# Altium PCB 信号采集板.PcbDoc (part 4 of 4)
Units mil, origin at the board's own origin, x right, y up, seen from the top; angles counter-clockwise.
Board outline 5905.51 x 1775.59 mil, 2 copper layers (Top Layer, Bottom Layer); 203 components, 126 nets, 643 pads, 227 vias.
Unrouted connection lines stored in the file: 2.
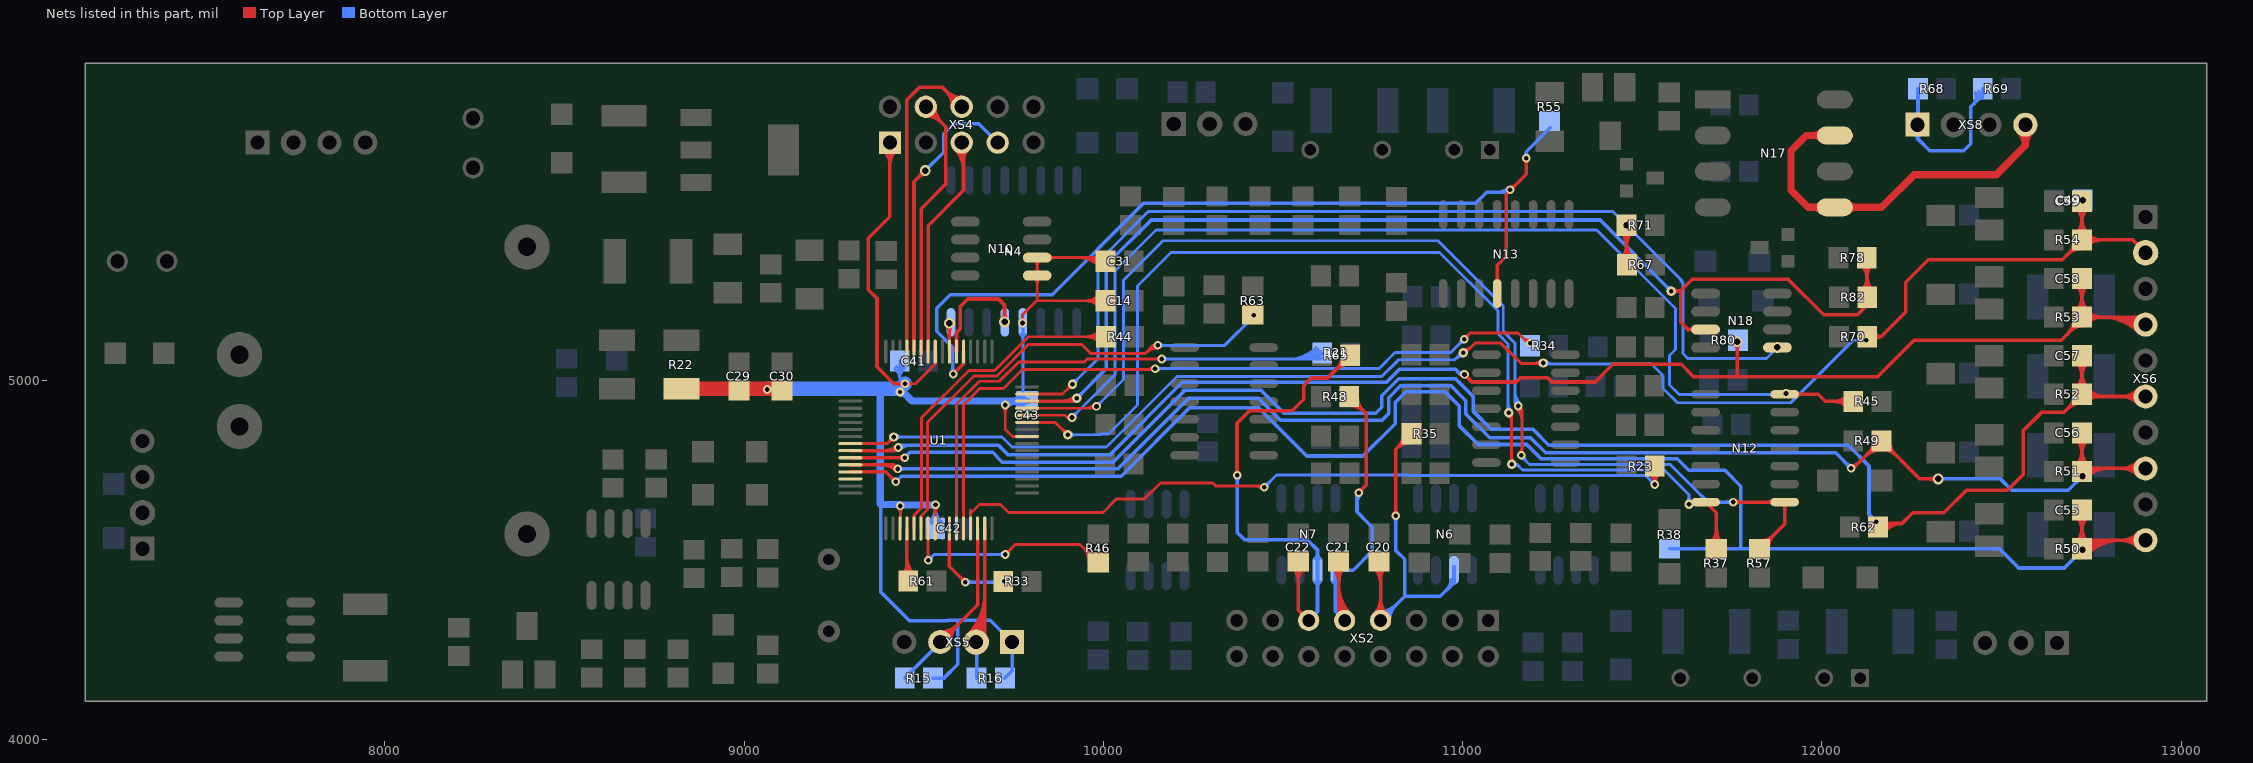
[diagram p4: the nets of this part, all layers, seen from the top]

## Via types
v1: diameter 24, hole 13, Top Layer to Bottom Layer, 112 vias
v2: diameter 30, hole 18, Top Layer to Bottom Layer, 58 vias
v3: diameter 25, hole 12, Top Layer to Bottom Layer, 22 vias
v4: diameter 26, hole 13, Top Layer to Bottom Layer, 17 vias
v5: diameter 35, hole 20, Top Layer to Bottom Layer, 12 vias
v6: diameter 40, hole 25, Top Layer to Bottom Layer, 2 vias
v7: diameter 30, hole 20, Top Layer to Bottom Layer, 2 vias
v8: diameter 25, hole 15, Top Layer to Bottom Layer, 2 vias

## Nets (pads, with @x,y where several pads share a name; then routed paths per layer and width w, separated by ;. In a path a pad name is that pad's centre, name@x,y a point inside that pad or via, vN(x,y) a via of type N, cw(c..) or ccw(c..) an arc to the next point about the centre after c; other vN are vias at no path point) (continued)
NTC4: C20.2 N6.2 R35.2 XS2.7 | length 1549.8
  Top Layer w10: C20.2@10753.05,4480.3 cw(c10708.49,4435.73) 10771.51,4435.73 ; XS2.7@10754.17,4349.82 ccw(c10712.3,4391.69) 10771.51,4391.69 ccw(c10830.73,4391.69) XS2.7@10788.86,4349.82 ; C20.2@10760.12,4487.37 cw(c10732.63,4459.88) 10771.51,4459.88 ; XS2.7@10761.24,4342.74 ccw(c10736.44,4367.54) 10771.51,4367.54 ccw(c10806.58,4367.54) XS2.7@10781.78,4342.74 ; C20.2@10767.04,4496.25 10771.51,4491.78 XS2.7@10771.51,4332.47 ; 10771.51,4447.85 cw(c10817.41,4447.85) C20.2@10784.96,4480.3 ; v1@10809.05,4628.95 ccw(c10797.1,4640.9) 10814,4640.9 ccw(c10830.9,4640.9) v1@10818.95,4628.95 ; v1(10814,4624) 10814,4667 10814,4678 10814,4685 10814,4808.74 R35.2@10857.26,4852 ; 10815.39,4810.13 cw(c10857.26,4768.26) R35.2@10857.26,4827.47 ; 10820.14,4814.88 ccw(c10784.99,4850.03) R35.2@10834.7,4850.03 ; R35.2@10832.46,4827.2 cw(c10857.26,4802.4) R35.2@10857.26,4837.47
  Bottom Layer w10: XS2.7@10771.51,4332.47 10838.44,4399.4 ; XS2.7@10771.51,4347 ccw(c10771.51,4382.07) 10796.31,4357.27 ccw(c10821.11,4332.47) XS2.7@10786.04,4332.47 ; XS2.7@10771.51,4357 ccw(c10771.51,4416.21) 10813.38,4374.34 ccw(c10855.25,4332.47) XS2.7@10796.04,4332.47 ; v1@10809.05,4619.05 cw(c10797.1,4607.1) 10814,4607.1 cw(c10830.9,4607.1) v1@10818.95,4619.05 ; v1(10814,4624) 10814,4592 10814,4526.99 10815.19,4525.8 10838.44,4502.55 10838.44,4399.4 ; 10954.8,4416.55 ccw(c10925.35,4446) N6.2@10967,4446 ; N6.2@10976,4482 10976,4437.75 10937.65,4399.4 10838.44,4399.4
NTC5: C21.2 N7.1 R48.2 XS2.9 | length 1563.7
  Top Layer w10: C21.2@10638.78,4480.3 cw(c10600.27,4441.79) 10654.73,4441.79 cw(c10709.19,4441.79) C21.2@10670.68,4480.3 ; C21.2@10645.85,4487.37 cw(c10624.41,4465.93) 10654.73,4465.93 cw(c10685.05,4465.93) C21.2@10663.61,4487.37 ; 10654.73,4359.78 ccw(c10698.82,4359.78) XS2.9@10667.64,4328.6 ; 10654.73,4383.92 ccw(c10722.96,4383.92) XS2.9@10674.71,4335.67 ; 10654.73,4408.07 ccw(c10747.11,4408.07) XS2.9@10681.78,4342.74 ; 10654.73,4432.21 ccw(c10771.25,4432.21) XS2.9@10688.86,4349.82 ; C21.2@10654.73,4496.25 10654.73,4349.26 XS2.9@10671.51,4332.47 ; R48.2@10684.43,4930.78 cw(c10684.43,4871.56) 10726.3,4913.44 ; R48.2@10684.43,4940.78 cw(c10684.43,4905.71) R48.2@10709.23,4930.51 ; R48.2@10684.43,4955.31 10732,4907.73 10732,4709 v1(10711,4688) ; R48.2@10706.98,4953.34 ccw(c10756.69,4953.34) 10721.54,4918.19 ; v1@10711,4695 ccw(c10711,4711.9) 10722.95,4699.95 ccw(c10734.9,4688) v1@10718,4688
  Bottom Layer w10: N7.1@10639.64,4439.64 cw(c10624.27,4424.27) 10646,4424.27 cw(c10667.73,4424.27) N7.1@10652.36,4439.64 ; N7.1@10646,4492 N7.1@10646,4472 ; N7.1@10652.36,4465.64 cw(c10667.73,4450.27) 10667.73,4472 cw(c10667.73,4493.73) N7.1@10652.36,4478.36 ; XS2.9@10671.51,4332.47 10646,4357.98 N7.1@10646,4472 ; 10706,4659.03 cw(c10739.97,4659.03) v1@10715.95,4683.05 ; v1(10711,4688) 10706,4683 10706,4634.68 10738.94,4601.74 10748.68,4592 10748.68,4525.39 10695.29,4472 N7.1@10646,4472
NTC6: C22.2 N7.2 R65.2 XS2.11 | length 1728.5
  Top Layer w10: v1@10368.05,4740.95 ccw(c10358.51,4750.49) 10372,4750.49 ; v1@10372,4737 10372,4881 10407,4916 ; 10372,4755.31 ccw(c10392.31,4755.31) v1@10377.95,4740.95 ; 10410,4916 10526,4916 10557.82,4947.82 10557.82,4985.82 10579,5007 10623.99,5007 R65.2@10687.18,5070.19 ; C22.2@10526.47,4480.3 cw(c10487.96,4441.79) 10542.42,4441.79 cw(c10596.88,4441.79) C22.2@10558.37,4480.3 ; C22.2@10533.54,4487.37 cw(c10512.1,4465.93) 10542.42,4465.93 cw(c10572.74,4465.93) C22.2@10551.3,4487.37 ; C22.2@10542.42,4496.25 10542.42,4361.56 XS2.11@10571.51,4332.47 ; 10645.31,5028.32 cw(c10687.18,4986.45) R65.2@10687.18,5045.66 ; 10650.06,5033.07 ccw(c10614.91,5068.22) R65.2@10664.62,5068.22 ; R65.2@10662.38,5045.39 cw(c10687.18,5020.59) R65.2@10687.18,5055.66
  Bottom Layer w10: v1@10368.05,4731.05 cw(c10356.1,4719.1) 10373,4719.1 cw(c10389.9,4719.1) v1@10377.95,4731.05 ; v1(10373,4736) 10373,4577 10393.12,4556.88 10567.57,4556.88 10596,4528.46 N7.2@10596,4472 ; XS2.11@10571.51,4332.47 10596,4356.96 N7.2@10596,4472 ; N7.2@10589.64,4439.64 cw(c10574.27,4424.27) 10596,4424.27 cw(c10617.73,4424.27) N7.2@10602.36,4439.64 ; N7.2@10589.64,4504.36 ccw(c10574.27,4519.73) 10596,4519.73 ccw(c10617.73,4519.73) N7.2@10602.36,4504.36 ; N7.2@10596,4492 N7.2@10596,4472
PD1: C49.1 C59.1 R54.2 R70.1 U1.9 XS6.2 | length 5101.4
  Top Layer w8: U1.9@9296,4824.52 9398.52,4824.52 v4(9417,4843) ; v4@9408,4843 cw(c9386.27,4843) 9401.64,4827.64 cw(c9417,4812.27) v4@9417,4834 ; v4(11002,5077) 11007,5077 11034,5104 11106,5104 11163,5047 11222,5047 v4(11224,5049) ; v4@11002,5086 ccw(c11002,5119.8) 11025.9,5095.9 ; v4@11011,5077 cw(c11020.66,5077) 11013.83,5083.83 ; 11197.44,5047 ccw(c11197.44,5075.56) v4@11217.64,5055.36 ; 11207.1,5047 cw(c11207.1,5032.1) v4@11217.64,5042.64 ; v4(12123,5112) R70.1@12127,5108
  Top Layer w10: R70.1@12121.53,5113.36 cw(c12141.31,5095.06) R70.1@12141.31,5122 ; R70.1@12126,5122 12164.19,5122 ; R70.1@12128.87,5106.57 cw(c12164.19,5073.88) 12164.19,5122 ; R70.1@12145.76,5111.11 cw(c12164.19,5100.96) 12164.19,5122 ; R70.1@12145.76,5132.89 ccw(c12164.19,5143.04) 12164.19,5122 ; 12681.85,5349.48 cw(c12723.72,5307.61) R54.2@12723.72,5366.82 ; 12686.6,5354.23 ccw(c12651.45,5389.38) R54.2@12701.16,5389.38 ; R54.2@12698.92,5366.55 cw(c12723.72,5341.75) R54.2@12723.72,5376.82 ; R54.2@12707.76,5409.27 ccw(c12669.25,5447.78) 12723.72,5447.78 ccw(c12778.18,5447.78) R54.2@12739.67,5409.27 ; C59.1@12707.76,5480.85 cw(c12669.25,5442.34) 12723.72,5442.34 cw(c12778.18,5442.34) C59.1@12739.67,5480.85 ; R54.2@12714.84,5402.2 ccw(c12693.4,5423.64) 12723.72,5423.64 ccw(c12754.04,5423.64) R54.2@12732.6,5402.2 ; C59.1@12714.84,5487.92 cw(c12693.4,5466.48) 12723.72,5466.48 cw(c12754.04,5466.48) C59.1@12732.6,5487.92 ; C59.1@12718.93,5494.93 cw(c12707.37,5483.37) C59.1@12723.72,5483.37 ; C59.1@12723.72,5472.35 cw(c12755.66,5472.35) C59.1@12733.07,5494.93 ; C59.1@12723.72,5498.77 R54.2@12723.72,5391.35 ; R54.2@12732.6,5382.47 cw(c12754.04,5361.03) 12754.04,5391.35 cw(c12754.04,5421.67) R54.2@12732.6,5400.23 ; R54.2@12739.67,5375.4 cw(c12778.18,5336.89) 12778.18,5391.35 cw(c12778.18,5445.81) R54.2@12739.67,5407.3 ; XS6.2@12900.65,5355.46 12864.76,5391.35 R54.2@12723.72,5391.35 ; 12164.19,5122 12232.93,5190.74 12232.93,5273.42 12295.92,5336.41 12668.77,5336.41 R54.2@12723.72,5391.35
  Bottom Layer w8: v4(9417,4843) 9718,4843 9746,4815 10009,4815 10205,5011 10775,5011 10822,5058 10977,5058 v4@10996,5077 ; v4@9423.36,4836.64 cw(c9438.73,4821.27) 9438.73,4843 cw(c9438.73,4864.73) v4@9423.36,4849.36 ; 10976.39,5057.39 cw(c11002,5031.79) v4@11002,5068 ; 10990.05,5071.05 cw(c11002,5059.1) v4@11002,5076 ; v4(11224,5049) v4@11231,5049 ; v4@11227.5,5045.5 11228,5046 11526,5046 11558,5014 11558,4978 11598,4938 11836,4938 ; v4@11230.36,5042.64 cw(c11238.49,5034.51) 11238.49,5046 ; v4@11230.36,5055.36 ccw(c11252.97,5077.97) 11252.97,5046 ; 11845,4938 11836,4938 ; v4@12116.64,5105.64 ccw(c12101.27,5090.27) 12101.27,5112 ccw(c12101.27,5133.73) v4@12116.64,5118.36 ; v4(12123,5112) 12087,5112 11913,4938 11836,4938
  other v2: 12726,5502
PD1_FALULT: N18.1 R67.2 R71.1 U1.47 | length 3172.8
  Top Layer w8: U1.47@9788.12,4962.31 9886.39,4962.31 v4(9914.03,4989.95) ; v4@9905.03,4989.95 cw(c9883.3,4989.95) 9898.67,4974.59 cw(c9914.03,4959.22) v4@9914.03,4980.95
  Top Layer w10: R71.1@11440.05,5414.08 cw(c11401.54,5375.57) 11456,5375.57 cw(c11510.46,5375.57) R71.1@11471.95,5414.08 ; R67.2@11441.31,5339.92 ccw(c11405.84,5375.39) 11456,5375.39 ; R71.1@11447.12,5421.15 cw(c11425.68,5399.71) 11456,5399.71 cw(c11486.32,5399.71) R71.1@11464.88,5421.15 ; R71.1@11449.31,5408.49 cw(c11446.48,5399.4) 11456,5399.4 ; 11456,5357.33 ccw(c11490.62,5357.33) R67.2@11466.14,5332.85 ; 11456,5381.47 ccw(c11514.76,5381.47) R67.2@11473.21,5339.92 ; R67.2@11457.26,5322 11456,5323.26 11456,5399.4 ; R71.1@11462.69,5408.49 ccw(c11465.52,5399.4) 11456,5399.4
  Bottom Layer w8: v4(9914.03,4989.95) 9984.9,5060.82 9984.9,5329.95 10125.21,5470.27 11417.73,5470.27 v2(11456,5432) 11610.54,5277.46 ; v4@9914.03,4998.95 ccw(c9914.03,5020.68) 9929.4,5005.32 ccw(c9944.76,4989.95) v4@9923.03,4989.95 ; 11606.94,5277.46 11612.88,5271.53 11612.88,5075.12 11626.5,5061.5 11845.5,5061.5 v2(11876,5092)
PD2: C58.1 R53.2 R80.1 U1.10 XS6.4 | length 5083.6
  Top Layer w10: U1.10@9296,4804.83 9420.83,4804.83 v1(9429.57,4813.57) ; 9391.57,4804.83 ccw(c9391.57,4851.57) v1@9424.62,4818.52 ; 9415.72,4804.83 ccw(c9415.72,4827.43) v1@9431.7,4811.45 ; v1@11005,5010 cw(c11005,4993.1) 11016.95,5005.05 cw(c11028.9,5017) v1@11012,5017 ; v1(11005,5017) 11026,4996 11149,4996 11161,5008 11236,5008 11248,4996 11369,4996 11418,5045 11608,5045 11643,5010 12154,5010 12256,5112 12666,5112 12723.72,5169.72 R53.2@12723.72,5176.51 ; v2@11757.35,5100.99 cw(c11740.28,5083.92) 11764.43,5083.92 cw(c11788.57,5083.92) v2@11771.5,5100.99 ; 11764.43,5010.57 v2(11764.43,5108.06) ; 12681.79,5127.79 ccw(c12635.04,5174.55) R53.2@12701.16,5174.55 ; 12693.45,5139.45 cw(c12723.72,5109.18) R53.2@12723.72,5151.99 ; 12698.86,5144.86 ccw(c12669.18,5174.55) R53.2@12711.16,5174.55 ; R53.2@12707.76,5194.43 ccw(c12669.25,5232.94) 12723.72,5232.94 ccw(c12778.18,5232.94) R53.2@12739.67,5194.43 ; C58.1@12707.76,5266.01 cw(c12669.25,5227.5) 12723.72,5227.5 cw(c12778.18,5227.5) C58.1@12739.67,5266.01 ; R53.2@12714.84,5187.36 ccw(c12693.4,5208.8) 12723.72,5208.8 ccw(c12754.04,5208.8) R53.2@12732.6,5187.36 ; C58.1@12714.84,5273.08 cw(c12693.4,5251.64) 12723.72,5251.64 cw(c12754.04,5251.64) C58.1@12732.6,5273.08 ; C58.1@12723.72,5283.93 R53.2@12723.72,5176.51 ; R53.2@12732.6,5167.63 cw(c12754.04,5146.19) 12754.04,5176.51 cw(c12754.04,5206.83) R53.2@12732.6,5185.39 ; R53.2@12739.67,5160.56 cw(c12778.18,5122.05) 12778.18,5176.51 cw(c12778.18,5230.98) R53.2@12739.67,5192.47 ; 12781.11,5176.51 cw(c12781.11,5035.93) XS6.4@12880.52,5135.34 ; 12805.25,5176.51 cw(c12805.25,5060.07) XS6.4@12887.59,5142.41 ; 12829.39,5176.51 cw(c12829.39,5084.21) XS6.4@12894.66,5149.48 ; 12853.53,5176.51 cw(c12853.53,5108.35) XS6.4@12901.73,5156.55 ; XS6.4@12900.65,5155.46 12879.6,5176.51 R53.2@12723.72,5176.51
  Bottom Layer w10: v1(9429.57,4813.57) 9436,4820 9708,4820 9734,4794 9841,4794 ; v1@9434.52,4808.62 cw(c9461.99,4781.16) 9461.99,4820 ; 9846,4794 9841,4794 ; 10985.5,5025.5 ccw(c10995.15,5035.15) v1@11001.66,5023.15 ; v1(11005,5017) 10994,5017 10980,5031 10824,5031 10788,4995 10220,4995 10019,4794 9841,4794
PD2_FALULT: N18.7 R78.2 R82.1 U1.46 | length 3627.7
  Top Layer w10: U1.46@9788.12,4942.63 v4@9917.89,4942.63 ; 9887.33,4942.63 ccw(c9887.33,4989.1) v4@9920.19,4956.24 ; 9911.47,4942.63 ccw(c9911.47,4964.96) v4@9927.26,4949.17 ; v4(11580.59,5248.59) 11581.8,5249.8 11606.94,5249.8 ; v4@11586.25,5242.93 cw(c11602.81,5226.37) 11602.81,5249.8 ; v4@11586.25,5254.25 ccw(c11597,5265) 11597,5249.8 ; N18.7@11643.64,5135.64 ccw(c11628.27,5120.27) 11628.27,5142 ccw(c11628.27,5163.73) N18.7@11643.64,5148.36 ; N18.7@11676,5142 11627,5142 11606.94,5162.06 11606.94,5249.8 ; R78.2@12108.79,5324.08 cw(c12070.28,5285.57) 12124.74,5285.57 cw(c12179.2,5285.57) R78.2@12140.69,5324.08 ; 12109.23,5192.95 ccw(c12098.24,5203.94) R82.1@12109.56,5214.58 ; R82.1@12110.05,5249.92 ccw(c12074.58,5285.39) 12124.74,5285.39 ; R78.2@12115.86,5331.15 cw(c12094.42,5309.71) 12124.74,5309.71 cw(c12155.06,5309.71) R78.2@12133.62,5331.15 ; 12116.52,5200.24 ccw(c12105.76,5211) R82.1@12116.85,5221.43 ; 12124.74,5267.33 ccw(c12159.36,5267.33) R82.1@12134.88,5242.85 ; 12124.74,5291.47 ccw(c12183.5,5291.47) R82.1@12141.95,5249.92 ; R78.2@12124.74,5342 12124.74,5233.26 R82.1@12126,5232 12126,5209.72 12099.07,5182.79 12004.66,5182.79 11905.45,5282 11639.15,5282 11606.94,5249.8
  Bottom Layer w10: v4(9925.84,4950.58) 10008.52,5033.26 10008.52,5322.08 10133.09,5446.65 11382.54,5446.65 v4(11580.59,5248.59) v4@11583.87,5245.31 ; v4@9925.84,4958.58 ccw(c9925.84,4977.9) 9939.5,4964.24 ccw(c9953.16,4950.58) v4@9933.84,4950.58 ; v4@11572.59,5248.59 ccw(c11553.28,5248.59) 11566.93,5262.25 ccw(c11580.59,5275.9) v4@11580.59,5256.59
PD3: C57.1 R52.2 R62.1 U1.11 XS6.6 | length 5260.7
  Top Layer w10: U1.11@9296,4785.15 v1(9447.15,4785.15) ; v1@9442.2,4780.2 ccw(c9430.25,4768.25) 9430.25,4785.15 ccw(c9430.25,4802.05) v1@9442.2,4790.1 ; v1(12151,4607) R62.1@12155,4607 ; R62.1@12155.95,4611.95 ccw(c12179.97,4635.97) R62.1@12179.97,4602 ; R62.1@12156,4602 12222.93,4602 ; R62.1@12165.5,4585.75 cw(c12201.05,4554.98) 12201.05,4602 ; R62.1@12171.95,4609.92 ccw(c12191.07,4629.04) 12191.07,4602 ; R62.1@12173.06,4579.21 cw(c12222.93,4536.05) 12222.93,4602 ; 12681.85,4919.8 cw(c12723.72,4877.93) R52.2@12723.72,4937.15 ; 12686.6,4924.56 ccw(c12651.45,4959.71) R52.2@12701.16,4959.71 ; R52.2@12698.92,4936.88 cw(c12723.72,4912.08) R52.2@12723.72,4947.15 ; R52.2@12707.76,4979.6 ccw(c12669.25,5018.11) 12723.72,5018.11 ccw(c12778.18,5018.11) R52.2@12739.67,4979.6 ; C57.1@12707.76,5051.17 cw(c12669.25,5012.66) 12723.72,5012.66 cw(c12778.18,5012.66) C57.1@12739.67,5051.17 ; R52.2@12714.84,4972.53 ccw(c12693.4,4993.96) 12723.72,4993.96 ccw(c12754.04,4993.96) R52.2@12732.6,4972.53 ; C57.1@12714.84,5058.25 cw(c12693.4,5036.81) 12723.72,5036.81 cw(c12754.04,5036.81) C57.1@12732.6,5058.25 ; C57.1@12723.72,5069.1 R52.2@12723.72,4961.68 ; R52.2@12732.6,4968.59 ccw(c12764.28,5000.27) 12764.28,4955.46 ; R52.2@12739.67,4943.76 cw(c12767.94,4915.49) 12767.94,4955.46 ; R52.2@12739.67,4975.66 ccw(c12788.42,5024.41) 12788.42,4955.46 ; XS6.6@12880.52,4935.34 ccw(c12831.93,4886.75) 12831.93,4955.46 ccw(c12831.93,5024.18) XS6.6@12880.52,4975.59 ; XS6.6@12887.59,4942.41 ccw(c12856.07,4910.89) 12856.07,4955.46 ccw(c12856.07,5000.04) XS6.6@12887.59,4968.52 ; XS6.6@12900.65,4955.46 12729.93,4955.46 R52.2@12723.72,4961.68 ; 12222.93,4602 12252.61,4631.69 12339.23,4631.69 12402.22,4694.68 12516.39,4694.68 12559.7,4737.98 12559.7,4860.03 12610.88,4911.21 12673.25,4911.21 R52.2@12723.72,4961.68
  Bottom Layer w10: v1(9447.15,4785.15) 9462,4800 9692,4800 9719,4773 10027,4773 10224.52,4970.52 ; 10222.04,4973 10439,4973 10503,4909 10758,4909 10775,4926 10775,4957.5 ; 10777.5,4960 10822.25,5004.75 10980.25,5004.75 11030,4955 11030,4914 11080,4864 11196,4864 11240,4820 12073,4820 12131,4762 12131,4627 v1(12151,4607) ; v1@12144,4607 ccw(c12127.1,4607) 12139.05,4618.95 ccw(c12151,4630.9) v1@12151,4614
PD3_FALULT: N12.1 R57.2 U1.45 | length 3607.3
  Top Layer w8: U1.45@9788.12,4922.94 9976,4922.94 v1(9981,4927.94) cw(c9968.93,4940.02) 9968.93,4922.94 ; 9949.62,4922.95 ccw(c9949.62,4959.33) v1@9975.34,4933.6 ; v1@11149.34,4923.34 cw(c11111.54,4885.54) 11165,4885.54 ; v1@11157.34,4797.66 ccw(c11138.86,4816.14) 11165,4816.14 ; v1@11165,4794 11165,4919 v1(11155,4929) cw(c11130.86,4904.86) 11165,4904.86 ; 11165,4806.49 ccw(c11177.49,4806.49) v1@11168.66,4797.66
  Top Layer w10: v1(11752.77,4661.77) N12.1@11896.16,4661.77 11896.16,4600.9 R57.2@11826,4530.74 ; v1@11757.72,4656.82 cw(c11769.67,4644.87) 11769.67,4661.77 cw(c11769.67,4678.67) v1@11757.72,4666.72 ; R57.2@11827.97,4553.3 ccw(c11827.97,4603.01) 11863.12,4567.86 ; R57.2@11840.53,4530.74 cw(c11875.6,4530.74) R57.2@11850.8,4555.54 ; R57.2@11850.53,4530.74 cw(c11909.74,4530.74) 11867.87,4572.61 ; N12.1@11863.21,4656.82 ccw(c11851.26,4644.87) 11851.26,4661.77 ccw(c11851.26,4678.67) N12.1@11863.21,4666.72 ; N12.1@11891.21,4656.82 cw(c11879.26,4644.87) 11896.16,4644.87 cw(c11913.06,4644.87) N12.1@11901.11,4656.82
  Bottom Layer w8: v1(9981,4927.94) 10056,5002.94 10056,5279 10166,5389 10931,5389 11113,5207 11113,5137 11146,5104 11146,4938 ; v1@9981,4935.95 ccw(c9981,4955.26) 9994.66,4941.6 ccw(c10008.31,4927.94) v1@9989,4927.94 ; 11146,4950.73 ccw(c11176.73,4950.73) v1(11155,4929) ; 11146,4970.04 ccw(c11196.04,4970.04) v1@11160.66,4934.66 ; v1@11163,4784 cw(c11163,4771.93) 11171.54,4780.46 ; v1@11163,4789 11186,4766 11578,4766 11667,4677 ; v1@11171,4792 ccw(c11197.56,4792) 11178.78,4773.22
  Bottom Layer w10: 11667,4677 11682.23,4661.77 v1(11752.77,4661.77) ; v1@11747.82,4656.82 ccw(c11735.87,4644.87) 11735.87,4661.77 ccw(c11735.87,4678.67) v1@11747.82,4666.72
  other v1: 11163,4792
PD4: C56.1 R49.1 R51.2 U1.12 XS6.8 | length 5164.5
  Top Layer w10: U1.12@9296,4765.46 9416.54,4765.46 v1(9428,4754) ; 9383.42,4765.46 cw(c9383.42,4709.42) v1@9423.05,4749.05 ; 9407.57,4765.46 cw(c9407.57,4733.57) v1@9430.12,4756.12 ; v1@12081,4763 ccw(c12081,4794.38) 12103.19,4772.19 ; v1@12087,4756 12163,4832 R49.1@12166,4832 12271.83,4726.17 v2(12323.48,4726.17) ; 12119.01,4788.01 cw(c12166,4741.02) 12166,4807.47 cw(c12166,4748.26) 12207.87,4790.13 ; 12131,4800 ccw(c12100.97,4830.03) R49.1@12143.44,4830.03 ; 12136.08,4805.08 cw(c12166,4775.16) 12166,4817.47 cw(c12166,4782.4) R49.1@12190.8,4807.2 ; R49.1@12188.56,4830.03 ccw(c12238.27,4830.03) 12203.12,4794.88 ; v2@12316.41,4719.1 ccw(c12299.34,4702.03) 12299.34,4726.17 ccw(c12299.34,4750.32) v2@12316.41,4733.24 ; R51.2@12707.76,4764.76 ccw(c12669.25,4803.27) 12723.72,4803.27 ccw(c12778.18,4803.27) 12739.67,4764.76 ccw(c12762.1,4787.19) 12762.1,4755.46 ; C56.1@12707.76,4836.34 cw(c12669.25,4797.83) 12723.72,4797.83 cw(c12778.18,4797.83) C56.1@12739.67,4836.34 ; R51.2@12714.84,4757.69 ccw(c12693.4,4779.13) 12723.72,4779.13 ccw(c12754.04,4779.13) R51.2@12732.6,4757.69 ; C56.1@12714.84,4843.41 cw(c12693.4,4821.97) 12723.72,4821.97 cw(c12754.04,4821.97) C56.1@12732.6,4843.41 ; R51.2@12717.98,4741.12 ccw(c12704.14,4754.96) R51.2@12723.72,4754.96 ; R51.2@12723.72,4761.42 ccw(c12752.43,4761.42) R51.2@12732.13,4741.12 ; C56.1@12723.72,4854.26 R51.2@12723.72,4746.84 R51.2@12732.34,4755.46 ; R51.2@12732.23,4741.01 cw(c12739.63,4748.18) R51.2@12732.34,4755.46 ; R51.2@12732.6,4739.93 cw(c12770.11,4702.41) 12770.11,4755.46 ; R51.2@12739.67,4732.85 cw(c12794.25,4678.27) 12794.25,4755.46 ; XS6.8@12880.52,4735.34 ccw(c12831.93,4686.75) 12831.93,4755.46 ccw(c12831.93,4824.18) XS6.8@12880.52,4775.59 ; XS6.8@12887.59,4742.41 ccw(c12856.07,4710.89) 12856.07,4755.46 ccw(c12856.07,4800.04) XS6.8@12887.59,4768.52 ; XS6.8@12900.65,4755.46 R51.2@12732.34,4755.46
  Bottom Layer w10: v1(9428,4754) 9865,4754 ; v1@9432.95,4749.05 cw(c9444.9,4737.1) 9444.9,4754 cw(c9444.9,4770.9) v1@9432.95,4758.95 ; 9877,4754 9865,4754 ; v1@12074,4756 ccw(c12057.1,4756) 12069.05,4767.95 ccw(c12081,4779.9) v1@12081,4763 ; v1(12081,4756) 12038,4799 11231,4799 11189,4841 11075,4841 11009,4907 11009,4943.71 10966.71,4986 10828,4986 10794.5,4952.5 10794.5,4908.5 10775,4889 10543,4889 10494,4889 10432,4951 10237,4951 10040,4754 9865,4754 ; v2(12323.48,4726.17) 12496.71,4726.17 12528.2,4694.68 12685.69,4694.68 v2(12725.06,4734.05)
PD4_FALULT: N12.7 R45.2 U1.44 | length 3261
  Top Layer w8: U1.44@9788.12,4903.26 9893,4903.26 9899.26,4897 v4(9913,4897) ; N12.7@11897,4961 11897.77,4961.77 v4(11900,4964)
  Top Layer w10: N12.7@11896.16,4961.77 11897.77,4961.77 11989.46,4961.77 12009.23,4942 R45.2@12087.26,4942 ; N12.7@11905.66,4958.34 cw(c11913.93,4950.07) N12.7@11913.93,4961.77 ; N12.7@11905.66,4969.66 ccw(c11924.7,4988.7) N12.7@11924.7,4961.77 ; N12.7@11929.11,4956.82 cw(c11941.06,4944.87) 11941.06,4961.77 cw(c11941.06,4978.67) N12.7@11929.11,4966.72 ; R45.2@12071.31,4926.05 ccw(c12032.8,4887.54) 12032.8,4942 ccw(c12032.8,4996.46) R45.2@12071.31,4957.95 ; R45.2@12078.38,4933.12 ccw(c12056.94,4911.68) 12056.94,4942 ccw(c12056.94,4972.32) R45.2@12078.38,4950.88
  Bottom Layer w8: v4(9913,4897) 10032.14,5016.14 10032.14,5304.44 10146.79,5419.09 11373.17,5419.09 11592,5200.25 11592,5086 11576,5070 11576,4988 11603,4961 v4@11897,4961 ; v4@9913,4906 ccw(c9913,4927.73) 9928.36,4912.36 ccw(c9943.73,4897) v4@9922,4897
PD5: C55.1 R38.1 R50.2 U1.13 XS6.10 | length 5398.4
  Top Layer w10: U1.13@9296,4745.78 9394.22,4745.78 v1(9422,4718) ; v1@9415,4718 ccw(c9398.1,4718) 9410.05,4729.95 ccw(c9422,4741.9) v1@9422,4725 ; R50.2@12707.76,4549.92 ccw(c12669.25,4588.43) 12723.72,4588.43 ccw(c12778.18,4588.43) R50.2@12739.67,4549.92 ; C55.1@12707.76,4621.5 cw(c12669.25,4582.99) 12723.72,4582.99 cw(c12778.18,4582.99) C55.1@12739.67,4621.5 ; R50.2@12714.84,4542.85 ccw(c12693.4,4564.29) 12723.72,4564.29 ccw(c12754.04,4564.29) R50.2@12732.6,4542.85 ; C55.1@12714.84,4628.57 cw(c12693.4,4607.13) 12723.72,4607.13 cw(c12754.04,4607.13) C55.1@12732.6,4628.57 ; R50.2@12717.98,4536.39 ccw(c12704.14,4550.23) R50.2@12723.72,4550.23 ; R50.2@12718.45,4539.23 cw(c12757.65,4500.04) 12757.65,4555.46 ; R50.2@12723.72,4556.7 ccw(c12752.43,4556.7) R50.2@12732.13,4536.39 ; C55.1@12723.72,4639.42 R50.2@12723.72,4532 12747.18,4555.46 XS6.10@12900.65,4555.46 ; R50.2@12725.06,4539.32 ccw(c12725.06,4553.77) R50.2@12735.27,4543.55 ; R50.2@12725.53,4532.16 cw(c12781.79,4475.89) 12781.79,4555.46 ; R50.2@12732.6,4525.09 cw(c12805.93,4451.75) 12805.93,4555.46 ; R50.2@12735.06,4529.32 cw(c12768.89,4529.32) R50.2@12744.97,4553.25 ; R50.2@12739.67,4518.02 cw(c12830.07,4427.61) 12830.07,4555.46 ; XS6.10@12880.52,4535.34 ccw(c12831.93,4486.75) 12831.93,4555.46 ccw(c12831.93,4624.18) XS6.10@12880.52,4575.59 ; XS6.10@12887.59,4542.41 ccw(c12856.07,4510.89) 12856.07,4555.46 ccw(c12856.07,4600.04) XS6.10@12887.59,4568.52
  Bottom Layer w10: v1(9422,4718) 9438,4734 10050,4734 10240,4924 10432,4924 10566,4790 10722,4790 10812,4880 10812,4939 10842,4969 10951,4969 10990,4930 10990,4875 11043,4822 11178,4822 11218,4782 11597,4782 11629,4750 11730,4750 11774,4706 11774,4533 ; R38.1@11576,4532 11775,4532 11825,4532 ; 11801,4532 11825,4532 ; v2(12725.06,4529.32) 12673.87,4478.14 12547.89,4478.14 12494.03,4532 11825,4532
PD5_FALULT: N12.14 R37.2 U1.43 | length 3383.6
  Top Layer w8: U1.43@9788.12,4883.57 9866.42,4883.57 v4(9901,4849) ; v4@9892,4849 ccw(c9870.27,4849) 9885.64,4864.36 ccw(c9901,4879.73) v4@9901,4858 ; v4@11125.77,4901.87 cw(c11121.14,4887.75) 11136,4887.75 ; v4@11128.26,4909.48 cw(c11124.76,4898.79) 11136,4898.79 ; v4(11128.57,4910.43) 11136,4903 11136,4889 ; v4@11130.64,4773.36 ccw(c11117.69,4786.31) 11136,4786.31 ; v4@11136,4768 11136,4889 ; 11136,4791.14 ccw(c11161.14,4791.14) v4@11143.36,4773.36 ; 11136,4893 11136,4889 ; v4@11636.36,4649.64 cw(c11651.73,4634.27) 11651.73,4656 cw(c11651.73,4677.73) N12.14@11636.36,4662.36 ; N12.14@11640.46,4663.93 cw(c11630,4666.86) v4(11630,4656) 11670.39,4656 N12.14@11676.16,4661.77
  Top Layer w10: N12.14@11676.16,4661.77 11706,4631.93 R37.2@11706,4530.74 ; R37.2@11690.05,4546.69 ccw(c11651.54,4585.2) 11706,4585.2 ccw(c11760.46,4585.2) R37.2@11721.95,4546.69 ; R37.2@11697.12,4539.62 ccw(c11675.68,4561.06) 11706,4561.06 ccw(c11736.32,4561.06) R37.2@11714.88,4539.62
  Bottom Layer w8: v4(9901,4849) 9991,4849 9993,4851 10014,4851 10095,4932 10095,5263 10188,5356 10936,5356 11098,5194 11098,5130 11126,5102 v4@11126,4910.43 ; v4@9907.36,4842.64 cw(c9922.73,4827.27) 9922.73,4849 cw(c9922.73,4870.73) v4@9907.36,4855.36 ; v4@11122.21,4916.79 ccw(c11113.06,4925.94) 11126,4925.94 ; 11126,4938.37 ccw(c11156.52,4938.37) v4@11134.94,4916.79 ; v4@11137.05,4766 cw(c11138.74,4734.14) 11161.3,4756.7 ; 11151,4767 11167,4751 11561,4751 11630,4682 v4(11630,4656) ; v4@11623.64,4662.36 ccw(c11608.27,4677.73) 11630,4677.73 ccw(c11651.73,4677.73) v4@11636.36,4662.36
  other v4: 11137,4767
PD6: U1.14
PDTRIGER: N13.4 R55.2 U1.53 | length 2755.3
  Top Layer w10: v1(9582,5018) 9610.96,5046.96 U1.53@9610.96,5080.42 ; v1@9582,5025 ccw(c9582,5041.9) 9593.95,5029.95 ccw(c9605.9,5018) v1@9589,5018 ; 9609.04,5045.04 ccw(c9602.79,5051.29) U1.53@9611.63,5051.29 ; N13.4@11091.05,5274.95 ccw(c11079.1,5286.9) 11096,5286.9 ccw(c11112.9,5286.9) N13.4@11100.95,5274.95 ; N13.4@11096,5242 11096,5321 11121,5346 11121,5414 ; 11121,5388 11121,5414 ; v1@11132,5538 ccw(c11132,5559.73) 11147.36,5544.36 ; v1@11139,5531 cw(c11151.07,5531) 11142.54,5539.54 ; v1@11172.05,5614.05 cw(c11160.1,5602.1) 11177,5602.1 cw(c11193.9,5602.1) v1@11181.95,5614.05 ; v1(11177,5619) 11177,5574 11121,5518 11121,5414
  Bottom Layer w10: v1@9577.05,5022.95 ccw(c9567.51,5032.49) 9581,5032.49 ; v1@9581,5019 9581,5092 9536,5137 9536,5201 9574,5239 9858,5239 10112,5493 11024,5493 11036,5493 11067,5524 11125,5524 v1(11132,5531) ; 9581,5037.31 ccw(c9601.31,5037.31) v1@9586.95,5022.95 ; 11098.2,5524 ccw(c11098.2,5564.8) v1@11127.05,5535.95 ; v1@11172.05,5623.95 ccw(c11160.1,5635.9) 11177,5635.9 ccw(c11193.9,5635.9) v1@11181.95,5623.95 ; v1(11177,5619) 11177,5637 R55.2@11244,5704
RXD: N4.5 U1.54 | length 353.5
  Top Layer w10: U1.54@9591.27,5080.42 9591.27,5133.27 9602,5144 9602,5206 9623,5227 9708,5227 9725.06,5209.94 v2(9725.06,5163.18) ; v2@9717.98,5170.25 ccw(c9700.91,5187.32) 9725.06,5187.32 ccw(c9749.2,5187.32) v2@9732.13,5170.25
SCK: R16.2 U1.31 XS5.2 | length 847.7
  Top Layer w10: XS5.2@9624.48,4293.52 ccw(c9514.55,4403.45) 9670.01,4403.45 ; XS5.2@9631.55,4286.45 ccw(c9538.69,4379.31) 9670.01,4379.31 ; XS5.2@9638.62,4279.38 ccw(c9562.84,4355.16) 9670.01,4355.16 ; XS5.2@9645.69,4272.31 ccw(c9586.98,4331.02) 9670.02,4331.02 ; XS5.2@9646,4272 9670.01,4296.02 U1.31@9670.01,4588.3 ; XS5.2@9652.76,4265.24 ccw(c9611.12,4306.88) 9670.01,4306.88
  Bottom Layer w10: XS5.2@9646,4272 9647.26,4270.74 R16.2@9647.26,4172
SDA: R15.2 U1.30 XS5.3 | length 678.4
  Top Layer w10: XS5.3@9546,4272 9650.33,4376.33 U1.30@9650.33,4588.3 ; XS5.3@9546,4290.46 ccw(c9546,4335.04) 9577.52,4303.52 ccw(c9609.04,4272) XS5.3@9564.46,4272 ; XS5.3@9546,4300.46 ccw(c9546,4369.18) 9594.59,4320.59 ccw(c9643.18,4272) XS5.3@9574.46,4272
  Bottom Layer w10: R15.2@9447.26,4172 9546,4270.74 XS5.3@9546,4272
TACT1: R23.2 U1.29 | length 2335.4
  Top Layer w8: U1.29@9630.65,4588.3 9630.65,4630 ; 9630.65,4639.65 9630.65,4630 ; 10421.44,4706 cw(c10421.44,4676.44) v1@10442.34,4697.34 ; 10435.93,4706 ccw(c10435.93,4715.07) v1@10442.34,4708.66 ; v1@10455.43,4706 10314,4706 10305,4715 10159,4715 10114,4670 10036,4670 9999,4633 9736,4633 9714,4655 9655.65,4655 9630.65,4630 ; R23.2@11519.94,4741.7 cw(c11494.96,4710.74) v1(11534.74,4710.74) ; R23.2@11524.97,4747.92 cw(c11508.47,4727.48) 11534.74,4727.48 cw(c11561.01,4727.48) R23.2@11544.51,4747.92 ; v1@11529.08,4716.4 ccw(c11515.43,4730.05) 11534.74,4730.05 ccw(c11554.05,4730.05) v1@11540.4,4716.4 ; R23.2@11534.74,4762 v1(11534.74,4710.74) ; R23.2@11549.54,4741.7 ccw(c11574.52,4710.74) v1(11534.74,4710.74)
  Bottom Layer w8: v1(10448,4703) 10482,4737 10754,4737 10849,4737 10850,4736 11509.48,4736 v1(11534.74,4710.74) ; v1@10448,4711 ccw(c10448,4730.31) 10461.66,4716.66 ccw(c10475.31,4703) v1@10456,4703 ; v1@11526.74,4710.74 ccw(c11507.43,4710.74) 11521.08,4724.4 ccw(c11534.74,4738.05) v1@11534.74,4718.74
TACT2: R34.2 U1.28 | length 2180.9
  Top Layer w8: U1.28@9610.96,4588.3 9610.96,4932.75 9656.21,4978 9722,4978 9775,5031 v1@10142,5031 ; 10119.86,5031 ccw(c10119.86,5057.14) v1@10138.34,5038.66 ; 10129.51,5031 cw(c10129.51,5018.51) v1@10138.34,5027.34 ; v1(11004,5115) 11021,5132 11140,5132 11154,5132 11182,5104 v1(11188,5104) ; v1@11004,5123 ccw(c11004,5142.31) 11017.66,5128.66 ccw(c11031.31,5115) v1@11012,5115 ; 11164.1,5121.9 ccw(c11188,5145.8) v1@11188,5112
  Bottom Layer w8: v1(10144,5033) 10767,5033 10812,5078 10967,5078 v1(11004,5115) ; v1@10149.66,5027.34 cw(c10163.31,5013.69) 10163.31,5033 cw(c10163.31,5052.31) v1@10149.66,5038.66 ; v1@10996,5115 cw(c10976.69,5115) 10990.34,5101.34 cw(c11004,5087.69) v1@11004,5107 ; R34.2@11187.26,5092 11187.26,5098.74 11182,5104 v1(11188,5104)
TACT3: R21.2 U1.27 | length 1725.9
  Top Layer w8: U1.27@9591.27,4588.3 9591.27,4934.27 9655,4998 9710.43,4998 9764.43,5052 9947,5052 ; 9948,5053 9947,5052 ; v1@10157.11,5054.34 ccw(c10143.45,5040.69) 10143.45,5060 ccw(c10143.45,5079.31) v1@10157.11,5065.66 ; v1(10162.77,5060) 9955,5060 9947,5052
  Bottom Layer w8: v1(10162.77,5060) 10605.26,5060 R21.2@10607.26,5062 ; v1@10168.43,5054.34 cw(c10182.08,5040.69) 10182.08,5060 cw(c10182.08,5079.31) v1@10168.43,5065.66 ; 10516.09,5060 ccw(c10516.09,5168.2) R21.2@10592.6,5091.69 ; 10535.41,5060 ccw(c10535.41,5148.88) R21.2@10598.26,5086.03 ; 10554.72,5060 ccw(c10554.72,5129.57) R21.2@10603.91,5080.38 ; 10574.04,5060 ccw(c10574.04,5110.26) R21.2@10609.57,5074.72
TACT4: R33.2 U1.26 | length 364.9
  Top Layer w10: U1.26@9571.59,4588.3 9571.59,4483.41 v1(9616,4439) ; v1@9609,4439 ccw(c9592.1,4439) 9604.05,4450.95 ccw(c9616,4462.9) v1@9616,4446 ; R33.2@9721.26,4441 v1(9725,4441)
  Bottom Layer w10: v1(9616,4439) 9727,4439 v1(9725,4441) ; v1@9620.95,4434.05 cw(c9632.9,4422.1) 9632.9,4439 cw(c9632.9,4455.9) v1@9620.95,4443.95 ; 9703.27,4439 ccw(c9703.27,4462.73) v1@9720.05,4445.95 ; 9712.93,4439 cw(c9712.93,4428.93) v1@9720.05,4436.05
TACT5: R46.2 U1.23 | length 871.5
  Top Layer w8: v1@9506.88,4505.12 ccw(c9493.22,4518.78) 9512.53,4518.78 ccw(c9531.85,4518.78) v1@9518.19,4505.12 ; v1(9512.53,4499.47) U1.23@9512.53,4588.3 ; v1(9727,4516) 9755,4544 9935.26,4544 R46.2@9986,4493.26 ; v1@9727,4524 ccw(c9727,4543.31) 9740.66,4529.66 ccw(c9754.31,4516) v1@9735,4516 ; 9942.42,4536.84 cw(c9898.84,4493.26) R46.2@9960.47,4493.26 ; 9947.17,4532.09 ccw(c9984.03,4568.94) R46.2@9984.03,4516.82 ; 9956.08,4523.18 cw(c9926.16,4493.26) R46.2@9968.47,4493.26 ; R46.2@9960.83,4518.43 ccw(c9984.03,4541.63) R46.2@9984.03,4508.82
  Bottom Layer w8: v1(9512.53,4499.47) 9529.07,4516 v1(9727,4516) ; v1@9512.53,4507.47 ccw(c9512.53,4526.78) 9526.19,4513.12 ccw(c9539.85,4499.47) v1@9520.53,4499.47 ; v1@9721.34,4510.34 ccw(c9707.69,4496.69) 9707.69,4516 ccw(c9707.69,4535.31) v1@9721.34,4521.66
TACT6: R63.2 U1.22 | length 1493.5
  Top Layer w8: U1.22@9492.85,4588.3 9492.85,4622.85 9511,4641 9511,4882 9510,4883 9640,5013 9704.21,5013 9792,5100.79 9939.21,5100.79 9965,5075 10116,5075 10139,5098 v1(10151,5098) ; U1.22@9493.18,4617.43 cw(c9507.06,4617.43) 9497.24,4627.24 ; 10116.86,5075.86 cw(c10151,5041.72) v1@10151,5090 ; 10130.51,5089.51 cw(c10151,5069.03) v1(10151,5098) ; v1@10149,5096 v1(10151,5098) ; v1(10419,5182) R63.2@10421,5184
  Bottom Layer w8: v1(10151,5098) 10338,5098 v1@10419,5179 ; v1@10156.66,5092.34 cw(c10170.31,5078.69) 10170.31,5098 cw(c10170.31,5117.31) v1@10156.66,5103.66 ; 10403.22,5163.22 ccw(c10384.44,5182) v1@10411,5182 ; 10410.46,5170.46 cw(c10419,5161.93) v1@10419,5174
TACT7: R44.2 U1.21 | length 1087.3
  Top Layer w8: U1.21@9473.17,4588.3 9473.17,4625.16 9494,4646 9494,4894.8 9493.4,4895.4 9626,5028 9698,5028 9792,5122 R44.2@10007.26,5122 ; U1.21@9473.5,4617.43 cw(c9492.96,4617.43) 9479.2,4631.2 ; R44.2@9990.6,5105.34 ccw(c9950.38,5065.12) 9950.38,5122 ccw(c9950.38,5178.88) R44.2@9990.6,5138.66 ; R44.2@9996.26,5111 ccw(c9969.7,5084.44) 9969.7,5122 ccw(c9969.7,5159.56) R44.2@9996.26,5133
TACT8: R61.2 U1.20 | length 267.4
  Top Layer w10: R61.2@9441.31,4459.92 ccw(c9411.92,4489.31) 9453.48,4489.31 ; 9453.48,4483.41 ccw(c9496.71,4483.41) R61.2@9466.14,4452.85 ; 9453.48,4507.56 ccw(c9520.85,4507.56) R61.2@9473.21,4459.92 ; U1.20@9453.48,4588.3 9453.48,4445.78 R61.2@9457.26,4442
TCK: U1.59 XS4.4 | length 892.4
  Top Layer w10: U1.59@9492.85,5080.42 9492.85,5478.22 9561.67,5547.04 9561.67,5706.33 XS4.4@9506,5762 ; XS4.4@9506,5736 cw(c9506,5673.23) 9550.38,5717.62 cw(c9594.77,5762) XS4.4@9532,5762 ; XS4.4@9506,5746 cw(c9506,5707.37) 9533.31,5734.69 cw(c9560.63,5762) XS4.4@9522,5762
TDI: U1.60 XS4.7 | length 861.9
  Top Layer w10: U1.60@9473.17,5080.42 9473.17,5553.02 v2(9504.58,5584.44) ; v2@9494.58,5584.44 cw(c9470.44,5584.44) 9487.51,5567.37 cw(c9504.58,5550.3) v2@9504.58,5574.44
  Bottom Layer w10: v2(9504.58,5584.44) 9555.76,5635.62 9555.76,5686.8 9583.32,5714.36 9653.64,5714.36 XS4.7@9706,5662
TDO: U1.61 XS4.6 | length 1050.1
  Top Layer w10: U1.61@9453.48,5080.42 9453.48,5781.37 9488.83,5816.72 9551.28,5816.72 XS4.6@9606,5762 ; XS4.6@9580,5762 ccw(c9517.23,5762) 9561.62,5806.38 ccw(c9606,5850.77) XS4.6@9606,5788 ; XS4.6@9590,5762 ccw(c9551.37,5762) 9578.69,5789.31 ccw(c9606,5816.63) XS4.6@9606,5778
TMS: U1.58 XS4.5 | length 766.4
  Top Layer w10: U1.58@9512.53,5080.42 9512.53,5430.98 9610.88,5529.32 9610.88,5657.12 XS4.5@9606,5662 ; XS4.5@9587.62,5643.62 cw(c9531.44,5587.44) 9610.88,5587.44 ; XS4.5@9594.69,5650.69 cw(c9555.59,5611.59) 9610.88,5611.59 ; 9610.88,5611.02 cw(c9656.98,5611.02) XS4.5@9624.38,5643.62
TXD: N4.8 U1.55 | length 116.8
  Top Layer w10: v2@9564.44,5152.17 cw(c9547.18,5134.91) 9571.59,5134.91 ; v2(9571.51,5159.24) 9571.59,5159.17 U1.55@9571.59,5080.42 ; 9571.59,5135.29 cw(c9595.47,5135.29) v2@9578.58,5152.17
VDD: C14.1 C29.1 C30.1 C31.1 C41.2 C42.2 C43.2 N4.4 N10.1 N10.2 R15.1 R16.1 R22.2 U1.19 U1.24 U1.41 U1.57 XS4.1 XS5.1 | length 5988.9
  Top Layer w8: v1@9429.34,4645.34 cw(c9415.69,4631.69) 9435,4631.69 cw(c9454.31,4631.69) v1@9440.66,4645.34 ; U1.19@9433.8,4588.3 9435,4589.5 v1(9435,4651) ; v1(9448,4991) 9477,4991 9532.22,5046.22 U1.57@9532.22,5080.42 ; v1@9453.66,4985.34 cw(c9467.31,4971.69) 9467.31,4991 cw(c9467.31,5010.31) v1@9453.66,4996.66 ; v1@9527.34,4648.34 cw(c9515.57,4636.57) 9532.22,4636.57 ; 9528.07,5042.07 ccw(c9518.85,5051.29) U1.57@9531.89,5051.29 ; U1.24@9532.22,4588.3 v1@9532.22,4653.22 ; 9532.22,4632.8 cw(c9554.2,4632.8) v1@9538.66,4648.34 ; v1@9721.34,4926.34 cw(c9707.69,4912.69) 9727,4912.69 cw(c9746.31,4912.69) v1@9732.66,4926.34 ; v1(9727,4932) 9727,4864 9746.8,4844.2 U1.41@9788.12,4844.2 ; v1@9769.34,5165.66 ccw(c9755.69,5179.31) 9775,5179.31 ccw(c9794.31,5179.31) v1@9780.66,5165.66 ; v1(9775,5160) 9775,5183 9814,5222 ; N10.1@9808.93,5284.93 cw(c9791.86,5267.86) 9816,5267.86 cw(c9840.14,5267.86) N10.1@9823.07,5284.93 ; N10.1@9808.93,5299.07 ccw(c9791.86,5316.14) 9816,5316.14 ccw(c9840.14,5316.14) N10.1@9823.07,5299.07 ; N10.2@9808.93,5334.93 cw(c9791.86,5317.86) 9816,5317.86 cw(c9840.14,5317.86) N10.2@9823.07,5334.93 ; N10.2@9849.07,5334.93 cw(c9866.14,5317.86) 9866.14,5342 cw(c9866.14,5366.14) N10.2@9849.07,5349.07 ; 9929.73,5342 cw(c9929.73,5257.7) C31.1@9989.34,5317.31 ; 9949.05,5342 cw(c9949.05,5277.02) C31.1@9995,5322.97 ; 9968.36,5342 cw(c9968.36,5296.33) C31.1@10000.65,5328.62 ; 9968.51,5342 ccw(c9968.51,5371.46) C31.1@9989.34,5350.63 ; C14.1@9989.34,5205.34 ccw(c9949.12,5165.12) 9949.12,5222 ccw(c9949.12,5278.88) C14.1@9989.34,5238.66 ; C14.1@9995,5211 ccw(c9968.44,5184.44) 9968.44,5222 ccw(c9968.44,5259.56) C14.1@9995,5233 ; C14.1@10006,5222 9814,5222 ; C31.1@10006,5332 9996,5342 N10.2@9816,5342 N10.1@9816,5292 9816,5224 9814,5222
  Top Layer w10: XS4.1@9387.62,5643.62 cw(c9343.23,5599.23) 9406,5599.23 cw(c9468.77,5599.23) XS4.1@9424.38,5643.62 ; XS4.1@9394.69,5650.69 cw(c9367.37,5623.37) 9406,5623.37 cw(c9444.63,5623.37) XS4.1@9417.31,5650.69 ; XS4.1@9406,5662 9406,5456 9346,5396 9346,5253 9370,5229 9370,5038 9417,4991 v1(9448,4991) ; v1@9443.05,4986.05 ccw(c9431.1,4974.1) 9431.1,4991 ccw(c9431.1,5007.9) v1@9443.05,4995.95
  Top Layer w40: R22.2@8826,4977 v1@9065,4977 ; 8953.71,4977 cw(c8953.71,4941.68) C29.1@8978.69,4966.65 ; C29.1@8993.31,4966.65 cw(c9018.29,4941.68) 9018.29,4977 ; v1@9073.71,4977 cw(c9073.71,4941.68) 9098.69,4966.65 ccw(c9073.71,4941.68) v1@9073.71,4977
  Bottom Layer w8: C41.2@9419.39,5032.98 cw(c9399.56,5005.74) 9433.26,5005.74 ; C41.2@9424.1,5039.45 cw(c9411.01,5021.46) 9433.26,5021.46 cw(c9455.51,5021.46) C41.2@9442.42,5039.45 ; C41.2@9433.26,5054 9433.26,5005.74 ; C41.2@9447.12,5032.98 ccw(c9466.95,5005.74) 9433.26,5005.74 ; v1(9448,4991) 9433.26,5005.74 ; C42.2@9515.56,4606.93 ccw(c9473.46,4649.03) v1@9533,4649.03 ; C42.2@9521.22,4601.27 ccw(c9492.77,4629.71) 9533,4629.71 ; v1@9527.34,4648.34 cw(c9513.69,4634.69) 9533,4634.69 cw(c9552.31,4634.69) v1@9538.66,4648.34 ; C42.2@9532.22,4588.3 9533,4589.08 v1(9533,4654) ; 9533,4625.95 ccw(c9567.9,4625.95) C42.2@9543.22,4601.27 ; v1@9533,4645.26 ccw(c9587.21,4645.26) C42.2@9548.88,4606.93 ; N4.4@9769.34,5154.34 cw(c9753.27,5138.27) N4.4@9776,5138.27 ; N4.4@9770.34,5128.34 cw(c9756.69,5114.69) 9776,5114.69 cw(c9795.31,5114.69) N4.4@9781.66,5128.34 ; N4.4@9776,5143.1 cw(c9791.9,5143.1) N4.4@9780.66,5154.34 ; N4.4@9776,5162 9776,4954.75 C43.2@9788.12,4942.63
  Bottom Layer w10: 9354,4977 9357,4980 ; 9381,4655 9381,4411 9460,4332 9568.05,4332 9568.52,4332.47 9638,4332.47 ; R15.1@9526,4172 9556.71,4172 9595.13,4210.43 9595.13,4329.61 ; 9622.69,4332.47 9638,4332.47 ; R16.1@9726,4172 9746,4192 XS5.1@9746,4272 9685.53,4332.47 9638,4332.47
  Bottom Layer w20: 9379,4977 9379,4657 9381,4655 ; 9382,4654 9381,4655 ; 9420.51,4655 cw(c9420.51,4636.51) v1@9433.59,4649.59 ; v3@9434,4965.5 cw(c9434,4937.74) 9453.63,4957.37 ; v1(9435,4651) v1@9432,4654 ; v1@9436.41,4649.59 cw(c9447.07,4638.93) 9447.07,4654 ; v3@9441.5,4969.5 9468.37,4942.63 C43.2@9788.12,4942.63 ; v1(9533,4654) v1@9432,4654 ; v1@9728.41,4930.59 cw(c9757.49,4901.51) 9757.49,4942.63 ; C43.2@9773.74,4930.21 ccw(c9743.76,4900.24) 9743.76,4942.63 ccw(c9743.76,4985.02) C43.2@9773.74,4955.05 ; 9381,4655 9431,4655 v1@9432,4654
  Bottom Layer w40: v1@9067,4977 9354,4977 9379,4977 9425,4977 ; v3@9434,4977 v1(9448,4991)
  other v1: 9065,4975
  other v3: 9434,4968
VIN: R68.2 R69.2 XS8.1 | length 581.2
  Bottom Layer w10: XS8.1@12257.6,5684.8 cw(c12254.09,5673.42) 12266,5673.42 ; R68.2@12267.26,5812 12267.26,5713.26 XS8.1@12266,5712 12266,5673.42 ; XS8.1@12274.4,5684.8 ccw(c12277.91,5673.42) 12266,5673.42 ; 12421.63,5769.21 ccw(c12402.37,5788.47) R69.2@12426.92,5800.26 ; 12431.61,5779.18 ccw(c12415.85,5794.94) R69.2@12435.94,5804.59 ; 12434.69,5782.27 cw(c12447.26,5769.7) R69.2@12447.26,5787.47 ; R69.2@12447.26,5812 12447.26,5794.83 12414.03,5761.61 12414.03,5659.24 12394.35,5639.56 12299.86,5639.56 12266,5673.42
VINGND: N17.5 N17.7 XS8.4 | length 1349.4
  Top Layer w20: N17.5@12000.39,5471.39 ccw(c11974.79,5445.79) 11974.79,5482 ccw(c11974.79,5518.21) N17.5@12000.39,5492.61 ; N17.7@12000.39,5671.39 ccw(c11974.79,5645.79) 11974.79,5682 ccw(c11974.79,5718.21) N17.7@12000.39,5692.61 ; N17.7@12036,5682 11956.47,5682 11914.03,5639.56 11914.03,5529.32 11961.35,5482 N17.5@12036,5482 12165.92,5482 12201.43,5517.51 ; N17.5@12071.61,5471.39 cw(c12097.21,5445.79) 12097.21,5482 cw(c12097.21,5518.21) N17.5@12071.61,5492.61 ; 12228.99,5545.07 12201.43,5517.51 ; XS8.4@12549.41,5695.41 cw(c12509.35,5655.35) 12566,5655.35 cw(c12622.65,5655.35) XS8.4@12582.59,5695.41 ; XS8.4@12566,5712 12566,5653.73 12484.9,5572.63 12256.55,5572.63 12201.43,5517.51
pads on no net: N4.1 N4.2 N4.10 N5.3 N5.4 N5.5 N5.6 N6.3 N6.4 N6.5 N6.6 N7.3 N7.4 N7.5 N7.6 N8.3 N8.4 N8.5 N8.6 N10.5 N10.6 N10.8 N12.8 N12.9 N12.10 N13.5 N13.6 N13.7 N13.9 N13.10 N13.11 N13.12 N13.13 U1.15 U1.16 U1.32 U1.33 U1.34 U1.35 U1.36 U1.37 U1.38 U1.39 U1.42 U1.48 U1.49 U1.50 U1.63 U1.64 XS4.8 XS4.10 XS9.2

## Polygon pours and split planes (outlines as drawn)
DGND on Bottom Layer "Top Layer-No Net" (solid, pour order 1000): 8894,4286 9016,4286 9016,4125 9019,4122 9974.06,4122 9988,4108.06 9988,5369 9992.26,5373.26 9351.74,5373.26 9345,5380 9345,5117 9348,5114 8902,5114 8894,5122 8894,4286
GND on Bottom Layer "Top Layer-No Net" (solid, remove dead copper, pour order 1001): 7166,5883.65 7166,4108.06 13071.51,4108.06 13071.51,5883.65 7166,5883.65

## Keep-outs
Keep-Out Layer:
  circle w10: c12874.66,4308.85 r70.87
  circle w10: c12874.66,5686.8 r70.87
  circle w10: c7362.85,4308.85 r70.87
  circle w10: c7362.85,5686.8 r70.87
  lines w19.68: 7166,4108.06 7166,5883.65 13071.51,5883.65 13071.51,4108.06 7166,4108.06

## Other copper
Top Layer:
  rectangle net GND: 9262,4901 9331,4986

## Silkscreen, mask and mechanical layers (free items; w line width, h text height)
Top Overlay:
  circle w10: c7362.85,5686.8 r124.5
  circle w10: c7362.85,4308.85 r124.5
  circle w10: c12874.66,4308.85 r124.5
  circle w10: c12874.66,5686.8 r124.5
  lines w7.87: 9954.35,4142.16 11501.59,4142.16 ; 9962.22,4437.43 11501.59,4437.43 11501.59,4146.09 ; 9966.16,4142.16 9926.79,4142.16 9926.79,4437.43 9974.03,4437.43 ; 10316.55,4138.22 10316.55,4437.43 ; 11123.64,4142.16 11123.64,4445.31
  text "RL2.850.091" at 7477,5488 h60
Bottom Overlay:
  text "RL7.820.052" at 8276,4692 h60

## Text inside footprints (layer, text, board x,y; h text height)
XS2: Top Overlay "2" at 11171.51,4252.47 h50 r180; Top Overlay "1" at 11171.51,4352.47 h50 r180; Top Overlay "15" at 10311.51,4352.47 h50 r180; Top Overlay "16" at 10311.51,4252.47 h50 r180